# Altium PCB PCB1.PcbDoc (part 1 of 2)
Units mm, origin at the board's own origin, x right, y up, seen from the top; angles counter-clockwise.
Board outline 70 x 15 mm, 4 copper layers (Top Layer, GND, VCC, Bottom Layer), stack 0.694 mm thick; 63 components, 43 nets, 212 pads, 80 vias.
Unrouted connection lines stored in the file: 38.
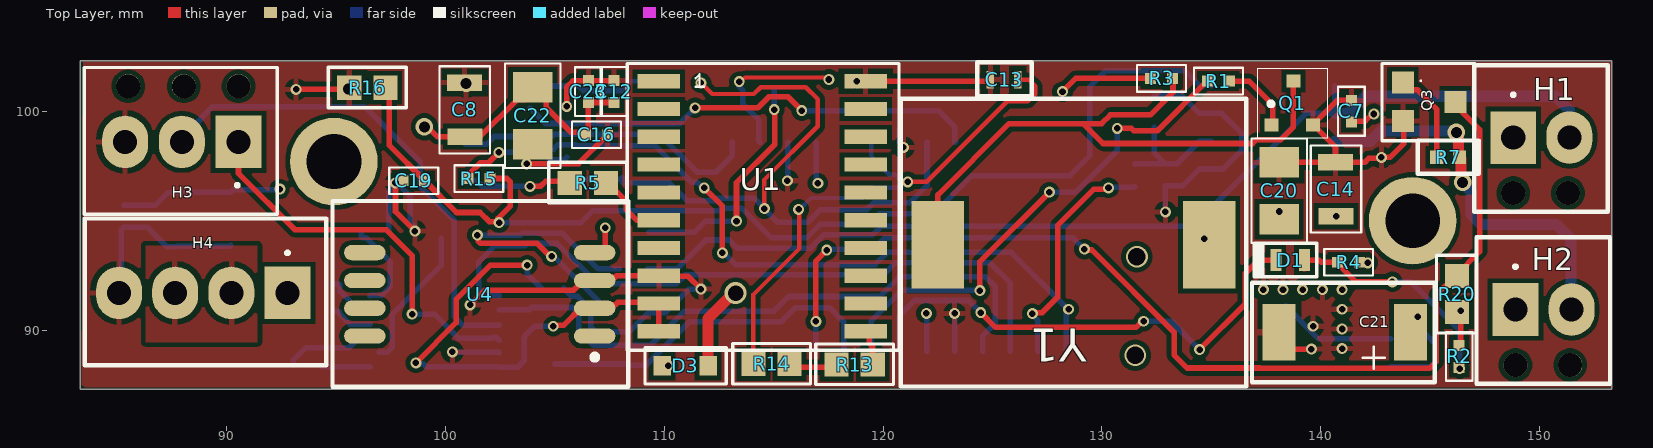
[diagram p0: Top Layer view]
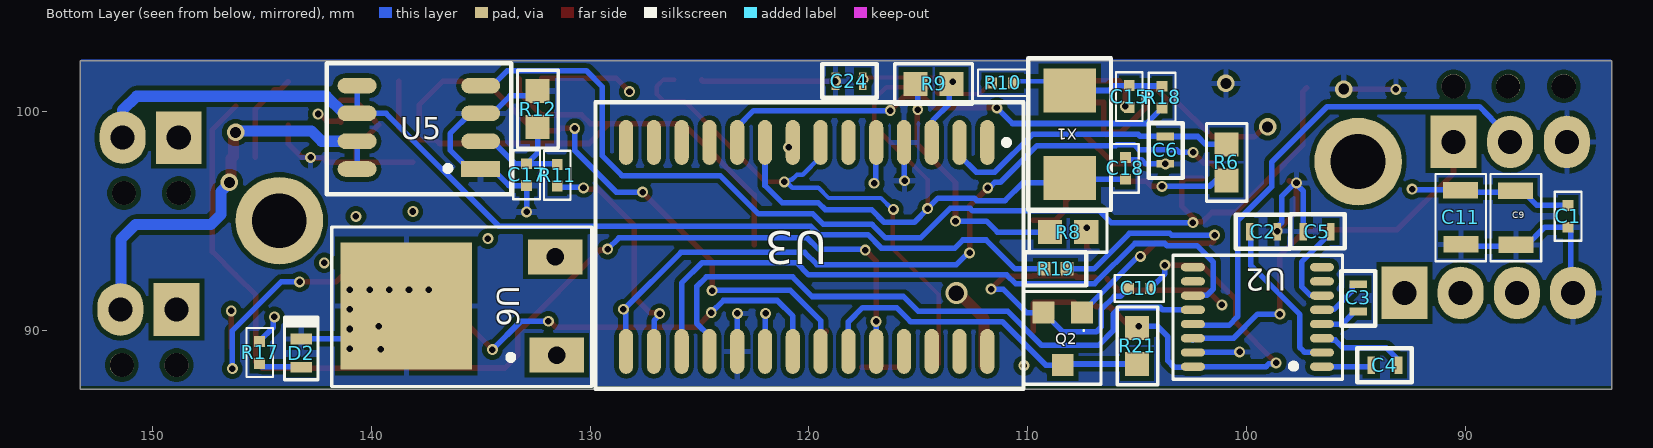
[diagram p1: Bottom Layer view, seen from below]
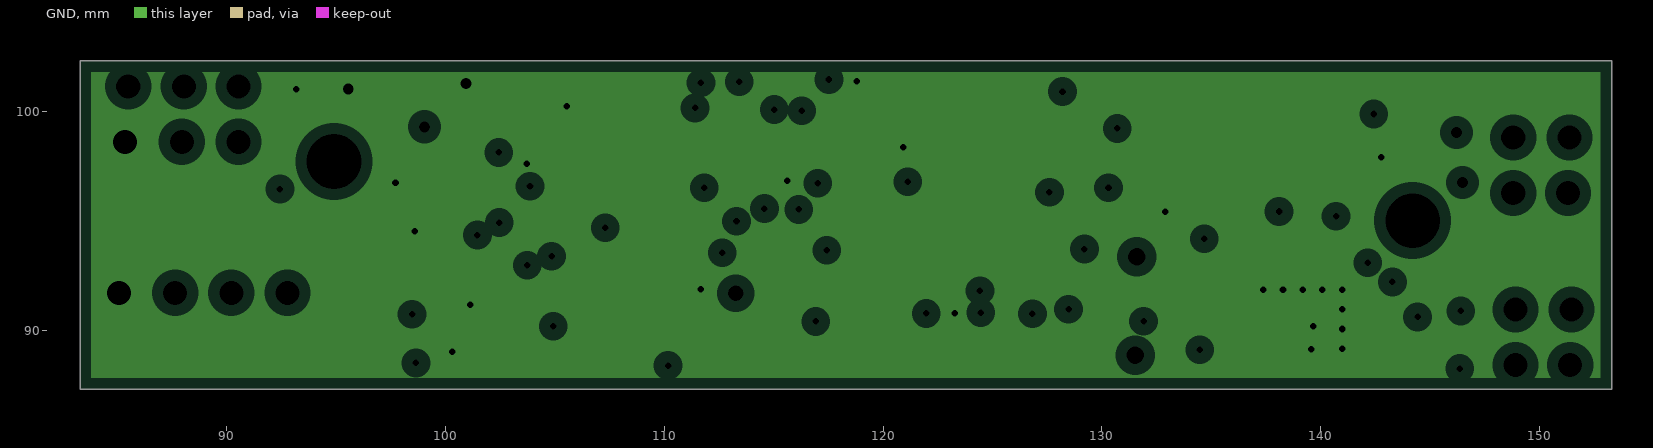
[diagram p2: GND, clearances drawn from the general rule]
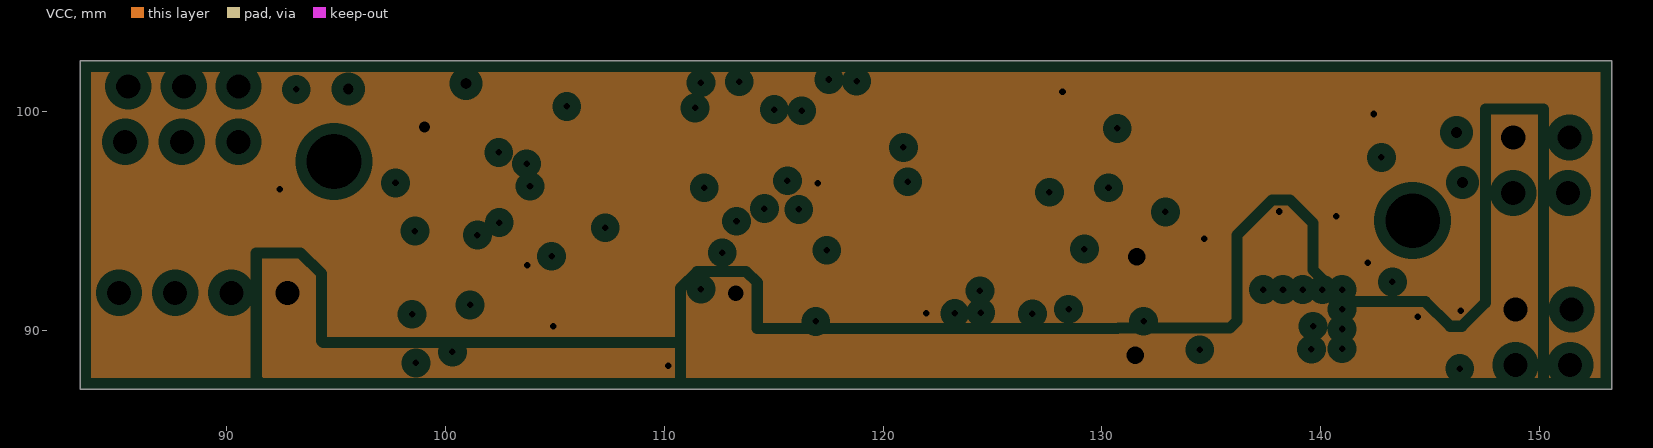
[diagram p3: VCC, clearances drawn from the general rule]
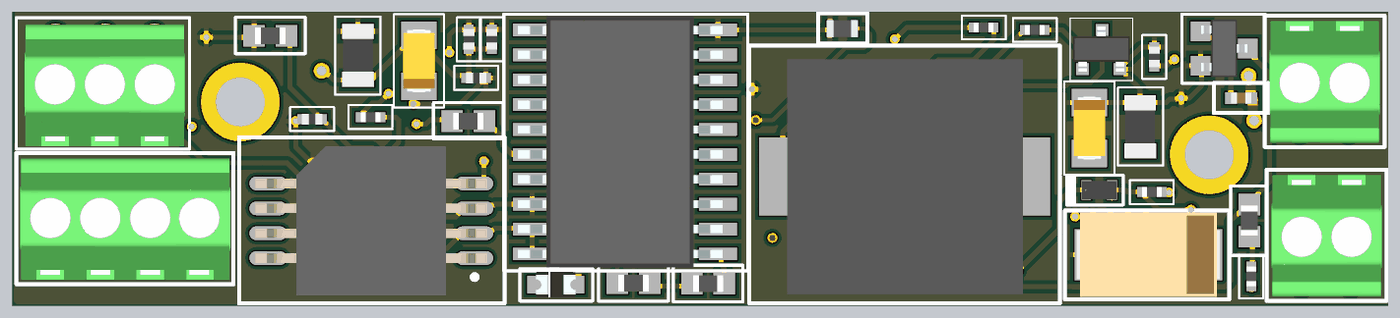
[diagram p4: 3D render of the assembled board from above, using the file's embedded part models]
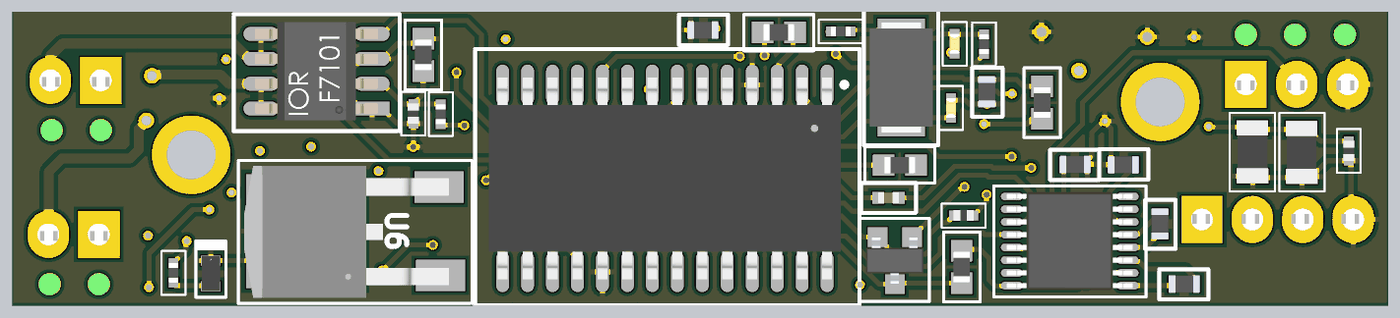
[diagram p5: 3D render of the assembled board from below, using the file's embedded part models]

## Layer stack, top to bottom
Top Solder: solder mask 0.0102, Solder Resist, Dk 3.5
Top Layer: signal copper 0.035
Dielectric 2: prepreg 0.1168, PP-016, Dk 4.4
GND: plane copper 0.035, net GND
Dielectric 1: dielectric 0.32, FR-4, Dk 4.8
VCC: plane copper 0.035, net (Multiple Nets)
Dielectric 3: prepreg 0.1168, PP-016, Dk 4.4
Bottom Layer: signal copper 0.035
Bottom Solder: solder mask 0.0102, Solder Resist, Dk 3.5

## Board outline
83.3,102.3 153.3,102.3 153.3,87.3 83.3,87.3

## Design rules (kind name [scope] priority, off if disabled: settings)
Clearance [All] p1: gap=0.21 ignorepadtopadclearanceinfootprint=TRUE
MinimumSolderMaskSliver MinimumSolderMaskSliver_U2 [Component = 'U2' vs InPadClass('All Pads')] p1: minsoldermaskwidth=0.01
MinimumSolderMaskSliver [All;] p2: minsoldermaskwidth=0.2
PlaneClearance [All] p1: clearance=0.508
PlaneConnect [All] p1: planeconnectstyle=Relief reliefexpansion=0.508 reliefentries=4 reliefconductorwidth=0.254 reliefairgap=0.254
PolygonConnect [All] p1: connectstyle=Relief reliefconductorwidth=0.254 reliefentries=4 polygonreliefangle="90 Angle" airgapwidth=0.254
RoutingVias [All] p1: holewidth=0.3 width=0.5 viastyle="Through Hole" minholewidth=0.3 minwidth=0.4 maxholewidth=1 maxwidth=1.2
SilkToSilkClearance [All] p1: silktosilkclearance=0.203
SilkToSolderMaskClearance [IsPad] p1: minsilkscreentomaskgap=0.16 clearancetoexposedcopper=TRUE
SolderMaskExpansion [All] p1: expansion=0.082 istentingtop=FALSE
Width [All] p1: maxlimit=0.508 minlimit=0.127 preferedwidth=0.254
25 further rules are at their usual default settings.

## Components (designator, comment, footprint, x,y, rotation, side; value= is the part's Value field where it differs from the comment)
C1 "100n" GRM155R71C104KA88D 85.3,95.2 r90 bottom
C2 "0.47 uF" TMK107F474ZA-T 99.225,94.5 r0 bottom value=470nF
C3 "0.47 uF" TMK107F474ZA-T 94.9,91.475 r270 bottom value=470nF
C4 "0.47 uF" TMK107F474ZA-T 93.675,88.4 r0 bottom value=470nF
C5 "0.47 uF" TMK107F474ZA-T 96.775,94.5 r180 bottom value=470nF
C6 "0.47 uF" TMK107F474ZA-T 103.708,98.222 r270 bottom value=470nF
C7 "100n" GRM155R71C104KA88D 141.4,100 r270 top
C8 "1u" CC1206KKX7R7BB105 100.889,100.076 r90 top
C9 "1u" CC1206KKX7R7BB105 87.7,95.125 r270 bottom
C10 "100n" GRM155R71C104KA88D 104.9,91.9 r0 bottom
C11 "1u" CC1206KKX7R7BB105 90.2,95.15 r90 bottom
C12 "100n" GRM155R71C104KA88D 107.7,100.9 r270 top
C13 "0.47 uF" TMK107F474ZA-T 125.527,101.448 r0 top value=470nF
C14 "1u" CC1206KKX7R7BB105 140.687,96.435 r270 top
C15 "8pF" GRM1555C1H8R0DZ01D 105.359,100.668 r90 bottom
C16 "100n" GRM155R71C104KA88D 106.9,98.925 r180 top
C17 "100n" GRM155R71C104KA88D 132.9,97.1 r90 bottom
C18 "8pF" GRM1555C1H8R0DZ01D 105.537,97.392 r90 bottom
C19 "100n" GRM155R71C104KA88D 98.55,96.825 r0 top
C20 "1uF" TPSA105K020R3000 138.1,96.368 r270 top
C21 "100uF" B45197A3107K509 141.1,89.9 r180 top
C22 "1uF" TPSA105K020R3000 103.988,99.797 r90 top
C23 "100n" GRM155R71C104KA88D 106.528,100.897 r270 top
C24 "0.47 uF" TMK107F474ZA-T 118.161,101.371 r180 bottom value=470nF
D1 "LED_ON" LNJ314G8TRA 138.6,93.2 r180 top
D2 "LED_ON" LNJ314G8TRA 143.2,88.95 r90 bottom
D3 "SD0805S020S1R0" SD0805S020S1R0 110.95,88.375 r0 top
H1 "1725656" "MPT 0,5/ 2-2,54" 150.07,98.8 r0 top
H2 "1725656" "MPT 0,5/ 2-2,54" 150.17,90.94 r0 top
H3 "1725669" "MPT 0,5/ 3-2,54" 89.27,98.6 r180 top
H4 "MPT0,5/4-2,54" "MPT 0,5/ 4-2,54" 88.966,91.7 r180 top
Q1 "BC817-25,235" BC817-25,235 137.75,99.375 r90 top
Q2 "MMBT6427" MMBT6427-7-F 108.4,89.6 r270 bottom
Q3 "MMBT6427" MMBT6427-7-F 144.958,100.432 r0 top
R1 "1k" CRCW04021K00JNED 135.325,101.375 r0 top
R2 "560R" CRCW0402560RJNED 146.329,88.798 r270 top
R3 "1k" CRCW04021K00JNED 132.725,101.5 r0 top
R4 "560R" CRCW0402560RJNED 141.275,93.1 r180 top
R5 "100k" MCT0603PD1003DP500 106.502,96.723 r180 top
R6 "100k" MCT0603PD1003DP500 100.914,97.663 r90 bottom
R7 "100k" RCA0402100KFKED 145.825,97.9 r0 top
R8 "100k" MCT0603PD1003DP500 108.15,94.475 r0 bottom
R9 "100k" MCT0603PD1003DP500 114.3,101.25 r180 bottom
R10 "1M" CRCW04021M00FKED 111.15,101.3 r0 bottom
R11 "1k" CRCW04021K00JNED 131.5,97.075 r270 bottom
R12 "100k" MCT0603PD1003DP500 132.4,100.1 r90 bottom
R13 "100k" MCT0603PD1003DP500 118.7,88.425 r180 top
R14 "100k" MCT0603PD1003DP500 114.9,88.45 r180 top
R15 "1k" CRCW04021K00JNED 101.524,96.926 r180 top
R16 "100k" MCT0603PD1003DP500 96.425,101.075 r180 top
R17 "560R" CRCW0402560RJNED 145.1,88.975 r270 bottom
R18 "1k" CRCW04021K00JNED 103.861,100.643 r90 bottom
R19 "100k" RCA0402100KFKED 108.725,92.8 r0 bottom
R20 "100k" MCT0603PD1003DP500 146.228,91.643 r270 top
R21 "100k" MCT0603PD1003DP500 105,89.275 r90 bottom
U1 "MMA3201KEGR2" MMA3201KEG 114.224,95.783 r0 top
U2 "MAX3232IPWR" MAX3232IPWR 99.5,90.6 r0 bottom
U3 "PIC18F2523-I/SO" PIC18F2523-I/SO 120.1,93.8 r270 bottom
U4 "MPXH6115A6U" MPXH6115A6U 101.564,91.633 r180 top
U5 "IRF7101TRPBF" IRF7101TRPBF 135,97.36 r0 bottom
U6 "MC78M05BDTG" MC78M05BDTG 135.149,91.1 r0 bottom
X1 "QZP10MEG" NX5032GA-10.000000MHZ 108.075,98.95 r90 bottom
Y1 "BUZZER" PKLCS1212E4001-R1 128.7,93.9 r180 top

## Footprints (in the part's own frame and the unit in brackets; to place one, negate y for a bottom-side part, rotate by r counter-clockwise, add the part's x,y. Pads: shape width x height; smd on the part's side, far side on the other; paste and mask are expansions set on the pad)
B45197A3107K509 [mm]
  rect 1.5x2.6 smd: 1(-3,0) 2(3,0)
  silkscreen extent -4.11,-2.26 4.24,2.29, body extent -3.64,-2.15 3.64,2.15, height 4.44
BC817-25,235 [mm] "SOT23, 3-Leads, Body 2,90x2,30mm, Pitch 0,95mm, IPC Low Density"
  rect 0.6x0.65 smd: 1(0,0) 2(0,-1.9) 3(2,-1)
  silkscreen extent -0.58,-2.57 2.59,0.64, body extent -0.13,-2.41 2.17,0.49, height 1.1
CC1206KKX7R7BB105 [mm]
  rect 0.75x1.6 smd: 1(-1.235,-0.013) 2(1.235,0.013)
  silkscreen extent -2.01,-1.14 1.98,1.17, body extent -1.6,-0.8 1.6,0.8, height 0.71
CRCW04021K00JNED [mm]
  rect 0.5x0.5 smd: 1(-0.5,0) 2(0.5,0)
  silkscreen extent -1.12,-0.61 1.12,0.61, body extent -0.5,-0.25 0.5,0.25, height 0.4
CRCW04021M00FKED [mm]
  rect 0.5x0.5 smd: 1(-0.5,0) 2(0.5,0)
  silkscreen extent -1.12,-0.61 1.12,0.61, body extent -0.5,-0.25 0.5,0.25, height 0.4
CRCW0402560RJNED [mm]
  rect 0.5x0.5 smd: 1(-0.5,0) 2(0.5,0)
  silkscreen extent -1.12,-0.61 1.12,0.61, body extent -0.5,-0.25 0.5,0.25, height 0.4
GRM155R71C104KA88D [mm]
  rect 0.5x0.5 smd: 1(-0.5,0) 2(0.5,0)
  silkscreen extent -1.12,-0.61 1.12,0.61, body extent -0.52,-0.28 0.52,0.28, height 0.56
GRM1555C1H8R0DZ01D [mm]
  rect 0.5x0.5 smd: 1(-0.5,0) 2(0.5,0)
  silkscreen extent -1.12,-0.61 1.12,0.61, body extent -0.5,-0.25 0.5,0.25, height 0.56
IRF7101TRPBF [mil] "SOIC, 8-Leads, Body 4,90x3,90mm, Pitch 1,27mm, IPC Low Density"
  rect 70x28 smd: 1(0,0)
  oval 70x28 smd: 2(0,-50) 3(0,-100) 4(0,-150) 5(222.44,-150) 6(222.44,-100) 7(222.44,-50) 8(222.44,0)
  silkscreen extent -55,-190 277,45, body extent -11,-173 234,23, height 69
LNJ314G8TRA [mm]
  rect 0.5x1 smd: 1(-0.65,0) 2(0.65,0)
  silkscreen extent -1.22,-0.76 1.65,0.79, body extent -0.88,-0.47 0.88,0.47, height 0.51
MAX3232IPWR [mm] "TSOP, 16-Leads, Body 5,00x4,40mm, Pitch 0,65mm, IPC Medium Density"
  oval 1.1x0.38 smd: 1(-2.95,2.275) 2(-2.95,1.625) 3(-2.95,0.975) 4(-2.95,0.325) 5(-2.95,-0.325) 6(-2.95,-0.975) 7(-2.95,-1.625) 8(-2.95,-2.275) 9(2.95,-2.275) 10(2.95,-1.625) 11(2.95,-0.975) 12(2.95,-0.325) 13(2.95,0.325) 14(2.95,0.975) 15(2.95,1.625) 16(2.95,2.275)
  silkscreen extent -3.89,-2.82 3.86,2.84, body extent -3.2,-2.5 3.2,2.5, height 1.13
MC78M05BDTG [mm] "D-PAK, 3-Pads, Body 6,21x6,73mm (max), IPC Low Density"
  rect 2.5x1.6 smd: 1(-3.627,2.25) 3(-3.552,-2.25)
  rect 6x5.8 smd: 4(3.251,0)
  silkscreen extent -5.23,-3.61 6.65,3.68, body extent -4.05,-3.34 6.37,3.39, height 1.7
MCT0603PD1003DP500 [mm]
  rect 1.1x1.1 smd: 1(-0.825,0) 2(0.825,0)
  silkscreen extent -1.78,-0.94 1.78,0.91, body extent -0.77,-0.43 0.77,0.43, height 0.55
MMA3201KEG [mm]
  rect 1.95x0.65 smd: 1(-4.471,5.588) 2(-4.471,4.318) 3(-4.471,3.048) 4(-4.471,1.778) 5(-4.471,0.508) 6(-4.471,-0.762) 7(-4.471,-2.032) 8(-4.471,-3.302) 9(-4.471,-4.572) 10(-4.471,-5.842) 11(4.979,-5.842) 12(4.979,-4.572) 13(4.979,-3.302) 14(4.979,-2.032) 15(4.979,-0.762) 16(4.979,0.508) 17(4.979,1.778) 18(4.979,3.048) 19(4.979,4.318) 20(4.979,5.588)
  silkscreen extent -5.92,-6.71 6.5,6.4, body extent -5.21,-6.53 5.21,6.28, height 3.55
MMBT6427-7-F [mm] "SOT223, 3-Leads, Body 2,90x2,36mm (avg), Pitch 1,75mm, IPC Medium Density"
  rect 1x1 smd: 1(-1.2,0.875) 2(-1.2,-0.875) 3(1.2,0)
  silkscreen extent -2.16,-1.78 2.08,1.75, body extent -1.18,-1.46 1.18,1.46, height 1.11
"MPT 0,5/ 2-2,54" [mm]
  rect 2.1x2.4 hole 1.1: 1(-1.27,0)
  oval 2.1x2.4 hole 1.1: 2(1.295,0)
  round 1.1 hole 1.1: ""(-1.27,-2.54) ""(1.23,-2.54)
  silkscreen extent -3.05,-3.4 3.05,3.3, body extent -2.8,-3.17 2.8,3.03, height 8.5
"MPT 0,5/ 3-2,54" [mm]
  rect 2.1x2.4 hole 1.1: 1(-1.27,0)
  oval 2.1x2.4 hole 1.1: 2(1.321,0) 3(3.912,0)
  round 1.1 hole 1.1: ""(-1.27,-2.54) ""(1.23,-2.54) ""(3.77,-2.54)
  silkscreen extent -3.05,-3.4 5.77,3.3, body extent -2.81,-3.05 5.33,3.15, height 8.5
"MPT 0,5/ 4-2,54" [mm]
  rect 2.1x2.4 hole 1.1: 1(-3.81,0)
  oval 2.1x2.4 hole 1.1: 2(-1.245,0) 3(1.321,0) 4(3.886,0)
  silkscreen extent -5.59,-3.4 5.46,3.3, body extent -5.42,-3.12 5.26,3.08, height 8.51
MPXH6115A6U [mm] "SOP, 8-Leads, Body 7,37x7,37mm, Pitch 1,27mm, IPC Medium Density"
  oval 1.9x0.7 smd: 1(-5.25,1.905) 2(-5.25,0.635) 3(-5.25,-0.635) 4(-5.25,-1.905) 5(5.25,-1.905) 6(5.25,-0.635) 7(5.25,0.635) 8(5.25,1.905)
  silkscreen extent -6.78,-4.27 6.73,4.22, body extent -5.9,-3.81 5.9,3.81, height 4.8
NX5032GA-10.000000MHZ [mm]
  rect 2x2.4 smd: 1(-2,0) 2(2,0)
  silkscreen extent -3.45,-1.88 3.48,1.91, body extent -2.8,-1.6 2.8,1.6, height 1.6
PIC18F2523-I/SO [mm] "SOIC, 28-Leads, Body 17,90x7,50mm, Pitch 1,27mm, IPC Low Density"
  oval 2.05x0.65 smd: 1(-4.775,8.255) 2(-4.775,6.985) 3(-4.775,5.715) 4(-4.775,4.445) 5(-4.775,3.175) 6(-4.775,1.905) 7(-4.775,0.635) 8(-4.775,-0.635) 9(-4.775,-1.905) 10(-4.775,-3.175) 11(-4.775,-4.445) 12(-4.775,-5.715) 13(-4.775,-6.985) 14(-4.775,-8.255) 15(4.775,-8.255) 16(4.775,-6.985) 17(4.775,-5.715) 18(4.775,-4.445) 19(4.775,-3.175) 20(4.775,-1.905) 21(4.775,-0.635) 22(4.775,0.635) 23(4.775,1.905) 24(4.775,3.175) 25(4.775,4.445) 26(4.775,5.715) 27(4.775,6.985) 28(4.775,8.255)
  silkscreen extent -6.6,-9.65 6.48,9.91, body extent -5.16,-8.95 5.16,8.95, height 2.64
PKLCS1212E4001-R1 [mm]
  rect 2.4x4 smd: 1(-6.2,0) 2(6.2,0)
  silkscreen extent -7.9,-6.68 7.9,6.48, body extent -6.03,-5.97 5.97,6.03, height 3.01
RCA0402100KFKED [mm]
  rect 0.6x0.6 smd: 1(-0.525,0) 2(0.525,0)
  silkscreen extent -1.4,-0.76 1.4,0.76, body extent -0.52,-0.28 0.52,0.28, height 0.41
SD0805S020S1R0 [mm]
  rect 0.8x0.9 smd: 1(-1.05,0) 2(1.05,0)
  silkscreen extent -1.83,-0.84 1.88,0.81, body extent -1.01,-0.65 1.01,0.65, height 0.8
TMK107F474ZA-T [mm]
  rect 0.35x0.8 smd: 1(-0.625,0) 2(0.625,0)
  silkscreen extent -1.22,-0.76 1.27,0.79, body extent -0.8,-0.46 0.8,0.44, height 0.81
TPSA105K020R3000 [mm]
  rect 1.4x1.8 smd: 1(-1.3,0) 2(1.3,0)
  silkscreen extent -2.39,-1.27 2.39,1.27, body extent -1.6,-0.8 1.6,0.8, height 1.81

## Part data
C1 C7 C10 C12 C16 C17 C19 C23: library part GRM155R71C104KA88D, "Multilayer Ceramic Capacitor, 0.1 uF, 16 V, ï¿½ 10%, X7R, 0402 [1005 Metric]", Capacitance=100nF, Case Code (Imperial)=0402, Case Code (Metric)=1005, Dielectric=X7R, Dielectric Material=4241ConductorMaterial, Manufacturer=Murata, Max Operating Temperature=125°C, Min Operating Temperature=-55°C, Package Quantity=1, Supplier Part Number 1=5964861, Tolerance=10%, Voltage=16V, Case/Package=0402, Category="Ceramic Capacitors", ComponentLink1Description=https://datasheet.ciiva.com/129/grm155r71c104ka88-01-129739.pdf?src-supplier=Digikey, ComponentLink1URL=https://datasheet.ciiva.com/129/grm155r71c104ka88-01-129739.pdf?src-supplier=Digikey, ComponentLink2Description=https://datasheet.ciiva.com/129/grm155r71c104ka88-01-129740.pdf?src-supplier=Digikey, ComponentLink2URL=https://datasheet.ciiva.com/129/grm155r71c104ka88-01-129740.pdf?src-supplier=Digikey, ComponentLink3Description=https://datasheet.ciiva.com/18102/getdatasheetpartid-85307-18102905.pdf?src-supplier=Verical, ComponentLink3URL=https://datasheet.ciiva.com/18102/getdatasheetpartid-85307-18102905.pdf?src-supplier=Verical, ComponentLink4Description=https://datasheet.ciiva.com/29199/454098-da-01-en-vs-kondensator-0402-29199799.pdf?src-supplier=Conrad, ComponentLink4URL=https://datasheet.ciiva.com/29199/454098-da-01-en-vs-kondensator-0402-29199799.pdf?src-supplier=Conrad, ComponentLink5Description=https://datasheet.ciiva.com/7937/4360-7937615.pdf?src-supplier=Element14, ComponentLink5URL=https://datasheet.ciiva.com/7937/4360-7937615.pdf?src-supplier=Element14, ComponentLink6Description=https://datasheet.ciiva.com/28534/4360-28534127.pdf?src-supplier=Element14, ComponentLink6URL=https://datasheet.ciiva.com/28534/4360-28534127.pdf?src-supplier=Element14, ComponentLink7Description=https://datasheet.ciiva.com/28534/4360-28534133.pdf?src-supplier=Element14, ComponentLink7URL=https://datasheet.ciiva.com/28534/4360-28534133.pdf?src-supplier=Element14, ComponentLink8Description=https://datasheet.ciiva.com/16199/product-16199000.pdf?src-supplier=Future+Electronics, ComponentLink8URL=https://datasheet.ciiva.com/16199/product-16199000.pdf?src-supplier=Future+Electronics, ComponentLink9Description=https://datasheet.ciiva.com/14103/grmseries-highdielectrictype-eng-14103750.pdf?src-supplier=Distrelec, ComponentLink9URL=https://datasheet.ciiva.com/14103/grmseries-highdielectrictype-eng-14103750.pdf?src-supplier=Distrelec, ComponentLink10Description=https://datasheet.ciiva.com/14116/grmseries-highdielectrictype-eng-14116878.pdf?src-supplier=Distrelec, ComponentLink10URL=https://datasheet.ciiva.com/14116/grmseries-highdielectrictype-eng-14116878.pdf?src-supplier=Distrelec, Depth=0.5mm, Height=0.5mm, Lead Free="Lead Free", Length=1mm, Manufacturer Part Number=GRM155R71C104KA88D, Material=Ceramic, Mount="Surface Mount", Number of Pins=2, Packaging="Tape and Reel", Pricing 1="10000=0,0044, 40000=0,0043, 100000=0,0042, 250000=0,004, 400000=0,0039 (USD)", Radiation Hardening=No, Reach SVHC Compliant=Unknown, RoHS=Yes, RoHS Compliant=Yes, Series=GRM, Stock 1=33520000, Supplier 1="Future Electronics", Termination=SMD/SMT, Thickness=0.022inch, Voltage Rating=16V, Voltage Rating (DC)=16V, Width=0.02inch
C2 C3 C4 C5 C6 C13 C24: library part TMK107F474ZA-T, "Multilayer Ceramic Capacitors (High dielectric type), 25V, 0.47 uF, +80%, 0603, Y5V/F, RoHS", Case/Package=0603, Dielectric=Y5V, Manufacturer=Taiyo, Supplier Part Number=08P5185, Voltage Rating (DC)=25V, Halogen Free="Halogen Free", Height=800um, Lead Free="Lead Free", Length=1.6mm, Manufacturer Part Number=TMK107F474ZA-T, Packaging="Cut Tape", Pins=2, RoHS=No, Supplier=Newark, Width=800um
C8 C9 C11 C14: library part CC1206KKX7R7BB105, "Multilayer Ceramic Capacitor, 1 uF, 16 V, ï¿½ 10%, X7R, 1206 [3216 Metric]", Capacitance=1uF, Case Code (Imperial)=1206, Case Code (Metric)=3216, Dielectric=X7R, Dielectric Material=Ceramic, Insulation Resistance=100GR, Manufacturer=Yageo, Max Operating Temperature=125°C, Min Operating Temperature=-55°C, Package Quantity=1, Supplier Part Number 1=9057753, Tolerance=10%, Voltage Rating=16V, Case/Package=1206, Category="Ceramic Capacitors", ComponentLink1Description=https://datasheet.ciiva.com/178/mlccorderingcode-178166.pdf?src-supplier=Digikey, ComponentLink1URL=https://datasheet.ciiva.com/178/mlccorderingcode-178166.pdf?src-supplier=Digikey, ComponentLink2Description=https://datasheet.ciiva.com/178/mlccorderingcode-178167.pdf?src-supplier=Digikey, ComponentLink2URL=https://datasheet.ciiva.com/178/mlccorderingcode-178167.pdf?src-supplier=Digikey, ComponentLink3Description=https://datasheet.ciiva.com/178/mlccorderingcode-178168.pdf?src-supplier=Digikey, ComponentLink3URL=https://datasheet.ciiva.com/178/mlccorderingcode-178168.pdf?src-supplier=Digikey, ComponentLink4Description=https://datasheet.ciiva.com/7978/1489800-7978229.pdf?src-supplier=Element14, ComponentLink4URL=https://datasheet.ciiva.com/7978/1489800-7978229.pdf?src-supplier=Element14, ComponentLink5Description=https://datasheet.ciiva.com/11464/upy-gphc-x7r-6-3v-to-50v-8-11464763.pdf?src-supplier=Avnet, ComponentLink5URL=https://datasheet.ciiva.com/11464/upy-gphc-x7r-6-3v-to-50v-8-11464763.pdf?src-supplier=Avnet, Depth=1.6mm, Halogen Free="Halogen Free", Height=1.15mm, Lead Free="Lead Free", Length=3.2mm, Manufacturer Part Number=CC1206KKX7R7BB105, Material=4241ConductorMaterial, Mount="Surface Mount", Number of Pins=2, Packaging="Tape and Reel", Pricing 1="3000=0,0252 (USD)", Radiation Hardening=No, Reach SVHC Compliant=No, RoHS=Yes, RoHS Compliant=Yes, Series=CC, Stock 1=174000, Supplier 1="Future Electronics", Termination=SMD/SMT, Thickness=0.045inch, Voltage Rating (AC)=16V, Voltage Rating (DC)=16V, Width=0.063inch
C15 C18: library part GRM1555C1H8R0DZ01D, "Cap Ceramic 8pF 50V C0G 0.5pF SMD 0402 125°C Paper T/R", Case Code (Imperial)=0402, Case Code (Metric)=1005, Dielectric=C0G, Manufacturer=Murata, Max Operating Temperature=125°C, Min Operating Temperature=-55°C, Package Quantity=10000, Voltage Rating=50V, Case/Package=0402, Category="Ceramic Capacitors", ComponentLink1Description=https://datasheet.ciiva.com/3778/8361grm1555c1h8r0dz0123-3778464.pdf?src-supplier=Arrow+Electronics, ComponentLink1URL=https://datasheet.ciiva.com/3778/8361grm1555c1h8r0dz0123-3778464.pdf?src-supplier=Arrow+Electronics, ComponentLink2Description=https://datasheet.ciiva.com/5413/product-5413574.pdf?src-supplier=Mouser, ComponentLink2URL=https://datasheet.ciiva.com/5413/product-5413574.pdf?src-supplier=Mouser, ComponentLink3Description=https://datasheet.ciiva.com/11610/product-11610154.pdf?src-supplier=Avnet, ComponentLink3URL=https://datasheet.ciiva.com/11610/product-11610154.pdf?src-supplier=Avnet, Construction=Flat, Depth=0.5mm, Height=0.5mm, Lead Free="Lead Free", Length=1mm, Manufacturer Part Number=GRM1555C1H8R0DZ01D, Mounting Technology="Surface Mount", Packaging="Tape and Reel", Pricing="10=0,05, 100=0,04, 1000=0,04, 10000=0,04 (USD)", Radiation Hardening=No, RoHS=Yes, RoHS Compliant=Yes, Series=GRM, Stock=59869, Supplier="CXDA Electronics", Supplier Part Number=GRM1555C1H8R0DZ01D, Termination=SMD/SMT, Thickness=0.022inch, Voltage Rating (DC)=50V, Width=0.02inch
C20 C22: library part TPSA105K020R3000, "Cap Tant Solid 1uF 20V A CASE 10%( 3.2 X 1.6 X 1.6mm) Inward L SMD 3216-18 3 Ohm 125C T/R", Case Code (Imperial)=1206, Case Code (Metric)=3216, Dielectric Material=Tantalum, ESR (Equivalent Series Resistance)=3R, Leakage Current=500nA, Manufacturer="Kyocera AVX", Max Operating Temperature=125°C, Min Operating Temperature=-55°C, Package Quantity=1, Supplier Part Number=478-2399-1-ND, Tolerance=10%, Voltage=20V, Case/Package=1206, Category="Tantalum Capacitors", ComponentLink1Description=https://datasheet.ciiva.com/26341/806571-da-01-en-smd-tantal1uf-20v-10-3-000r-2000st-26341825.pdf?src-supplier=Conrad, ComponentLink1URL=https://datasheet.ciiva.com/26341/806571-da-01-en-smd-tantal1uf-20v-10-3-000r-2000st-26341825.pdf?src-supplier=Conrad, ComponentLink2Description=https://datasheet.ciiva.com/263/tps-263911.pdf?src-supplier=Digikey, ComponentLink2URL=https://datasheet.ciiva.com/263/tps-263911.pdf?src-supplier=Digikey, ComponentLink3Description=https://datasheet.ciiva.com/263/tps-263912.pdf?src-supplier=Digikey, ComponentLink3URL=https://datasheet.ciiva.com/263/tps-263912.pdf?src-supplier=Digikey, ComponentLink4Description=https://datasheet.ciiva.com/263/tps-263913.pdf?src-supplier=Digikey, ComponentLink4URL=https://datasheet.ciiva.com/263/tps-263913.pdf?src-supplier=Digikey, ComponentLink5Description=https://datasheet.ciiva.com/7832/1441576-7832617.pdf?src-supplier=Element14, ComponentLink5URL=https://datasheet.ciiva.com/7832/1441576-7832617.pdf?src-supplier=Element14, ComponentLink6Description=https://datasheet.ciiva.com/7832/1441576-7832845.pdf?src-supplier=Element14, ComponentLink6URL=https://datasheet.ciiva.com/7832/1441576-7832845.pdf?src-supplier=Element14, ComponentLink7Description=https://datasheet.ciiva.com/7832/1441576-7832846.pdf?src-supplier=Element14, ComponentLink7URL=https://datasheet.ciiva.com/7832/1441576-7832846.pdf?src-supplier=Element14, ComponentLink8Description=https://datasheet.ciiva.com/7832/tps-7832847.pdf?src-supplier=Element14, ComponentLink8URL=https://datasheet.ciiva.com/7832/tps-7832847.pdf?src-supplier=Element14, ComponentLink9Description=https://datasheet.ciiva.com/28555/1932865-28555241.pdf?src-supplier=Element14, ComponentLink9URL=https://datasheet.ciiva.com/28555/1932865-28555241.pdf?src-supplier=Element14, ComponentLink10Description=https://datasheet.ciiva.com/12910/tps-23028-12910247.pdf?src-supplier=Mouser, ComponentLink10URL=https://datasheet.ciiva.com/12910/tps-23028-12910247.pdf?src-supplier=Mouser, ComponentLink11Description=https://datasheet.ciiva.com/16224/tps-16224686.pdf?src-supplier=Future+Electronics, ComponentLink11URL=https://datasheet.ciiva.com/16224/tps-16224686.pdf?src-supplier=Future+Electronics, ComponentLink12Description=https://datasheet.ciiva.com/14590/70001047-14590583.pdf?src-supplier=Allied+Electronics, ComponentLink12URL=https://datasheet.ciiva.com/14590/70001047-14590583.pdf?src-supplier=Allied+Electronics, ComponentLink13Description=https://datasheet.ciiva.com/14590/70001047-14590587.pdf?src-supplier=Allied+Electronics, ComponentLink13URL=https://datasheet.ciiva.com/14590/70001047-14590587.pdf?src-supplier=Allied+Electronics, ComponentLink14Description=https://datasheet.ciiva.com/3004/tps-3004579.pdf?src-supplier=Avnet, ComponentLink14URL=https://datasheet.ciiva.com/3004/tps-3004579.pdf?src-supplier=Avnet, Construction=Flat, Depth=1.6mm, Dissipation Factor=4%, Features="General Purpose", Height=1.6mm, Height - Seated (Max)=0.071inch, Lead Free="Lead Free", Lead Pitch=1.1mm, Length=3.2mm, Manufacturer Part Number=TPSA105K020R3000, Mounting Technology="Surface Mount,PCB", Packaging="Tape and Reel", Pins=2, Polarity=Polar, Pricing="1=0,76, 10=0,459, 50=0,3398, 100=0,3028, 500=0,2398, 1000=0,22014, 2000=0,20387, 4000=0,19039, 6000=0,18361, 10000=0,17607, 14000=0,17164, 20000=0,16737, 50000=0,15812 (USD)", Radiation Hardening=No, Reach SVHC Compliant=No, RoHS=Yes, RoHS Compliant=Yes, Series=TPS, Stock=46298, Supplier=Digikey, Termination=SMD/SMT, Voltage Rating=20V, Voltage Rating (DC)=20V, Weight=0.000571oz, Width=1.6mm
C21: library part B45197A3107K509, "Cap 100UF 16VDC 10% 7.3 X 4.3 X 4.1MM SMD 7343-43 T/r", Case Code (Imperial)=2917, Case Code (Metric)=7343, Dielectric Material=Tantalum, ESR (Equivalent Series Resistance)=100mR, Leakage Current=16uA, Manufacturer=KEMET, Max Operating Temperature=125°C, Min Operating Temperature=-55°C, Supplier Part Number 1=9751084, Tolerance=10%, Voltage=16V, Capacitance=100uF, Case/Package=2917, Category="Tantalum Capacitors", ComponentLink1Description=https://datasheet.ciiva.com/5934/58264-5934481.pdf?src-supplier=Farnell, ComponentLink1URL=https://datasheet.ciiva.com/5934/58264-5934481.pdf?src-supplier=Farnell, ComponentLink2Description=https://datasheet.ciiva.com/11793/0900766b809b4274-11793801.pdf?src-supplier=Rs, ComponentLink2URL=https://datasheet.ciiva.com/11793/0900766b809b4274-11793801.pdf?src-supplier=Rs, ComponentLink3Description=https://datasheet.ciiva.com/1464/1761160-1464734.pdf?src-supplier=Element14, ComponentLink3URL=https://datasheet.ciiva.com/1464/1761160-1464734.pdf?src-supplier=Element14, ComponentLink4Description=https://datasheet.ciiva.com/1464/1761160-1464735.pdf?src-supplier=Element14, ComponentLink4URL=https://datasheet.ciiva.com/1464/1761160-1464735.pdf?src-supplier=Element14, Depth=4.3mm, Dissipation Factor=8%, Height=4.4mm, Lead Free="Lead Free", Length=7.3mm, Manufacturer Part Number=B45197A3107K509, Mount="Surface Mount", Number of Pins=2, Packaging="Tape and Reel", Pricing 1="1=2,31, 10=1,54, 50=1,07, 100=0,889, 200=0,771, 400=0,66, 2000=0,578 (GBP)", Reach SVHC Compliant=No, RoHS=Yes, RoHS Compliant=Yes, Series=B45197A, Supplier 1=Farnell, Termination=SMD/SMT, Voltage Rating=16V, Voltage Rating (DC)=16V, Weight=0.023634oz, Width=4.3mm
D1 D2: library part LNJ314G8TRA, "Led SMT Grn Cut Tapes", Case Code (Imperial)=0603, Case Code (Metric)=1608, Color=Green, Forward Current=10mA, Forward Voltage=2.03V, Manufacturer="Panasonic SSG", Max Operating Temperature=85°C, Min Operating Temperature=-30°C, Power Rating=40mW, Case/Package=0603, Category=LEDs, ComponentLink1Description=https://datasheet.ciiva.com/9326/lnj314g8tra-bek-discon-9326750.pdf?src-supplier=Avnet, ComponentLink1URL=https://datasheet.ciiva.com/9326/lnj314g8tra-bek-discon-9326750.pdf?src-supplier=Avnet, Height=0.5mm, Illumination Color=Green, Lead Free="Lead Free", Length=1.6mm, Lens Size=0.8mm, Lens Style=Flat,Rectangular, Luminous Intensity=5mcd, Manufacturer Part Number=LNJ314G8TRA, Mount="Surface Mount", Number of LEDs=1, Number of Pins=2, Packaging="Tape and Reel", Pricing 1="1=1,03385 (USD)", Radiation Hardening=No, RoHS=Yes, RoHS Compliant=Yes, Series=-, Stock 1=450, Supplier 1="Ampacity Systems", Supplier Part Number 1=LNJ314G8TRA, Test Current=10mA, Wavelength=565nm, Width=0.8mm
D3: "Small Signal Schottky Diode, Single, 20 V, 1 A, 450 Mv, 10 A, 125 C Rohs Compliant: Yes", Average Rectified Current=1A, Case Code (Imperial)=0805, Case Code (Metric)=2012, Forward Voltage=450mV, Manufacturer="Kyocera AVX", Max Forward Surge Current (Ifsm)=10A, Max Operating Temperature=125°C, Max Repetitive Reverse Voltage (Vrrm)=20V, Max Reverse Current=200uA, Min Operating Temperature=-55°C, Supplier Part Number=478-7800-1-ND, Case/Package=0805, Category="Rectifier Diodes", ComponentLink1Description=https://datasheet.ciiva.com/29883/schottky-29883740.pdf?src-supplier=Avnet, ComponentLink1URL=https://datasheet.ciiva.com/29883/schottky-29883740.pdf?src-supplier=Avnet, ComponentLink2Description=https://datasheet.ciiva.com/29883/schottky-29883741.pdf?src-supplier=Avnet, ComponentLink2URL=https://datasheet.ciiva.com/29883/schottky-29883741.pdf?src-supplier=Avnet, ComponentLink3Description=https://datasheet.ciiva.com/13084/schottky-221155-13084174.pdf?src-supplier=Mouser, ComponentLink3URL=https://datasheet.ciiva.com/13084/schottky-221155-13084174.pdf?src-supplier=Mouser, Forward Current=1A, Manufacturer Part Number=SD0805S020S1R0, Max Reverse Leakage Current=200uA, Max Reverse Voltage (DC)=20V, Max Surge Current=10A, Mounting Technology="Surface Mount", Packaging="Cut Tape", Peak Non-Repetitive Surge Current=10A, Pins=2, Pricing="1=0,51, 10=0,311, 100=0,1972, 500=0,14792, 1000=0,132, 3000=0,11174, 6000=0,10152, 9000=0,09631, 15000=0,09046, 21000=0,08699, 30000=0,08362, 75000=0,07622 (USD)", Radiation Hardening=No, Reach SVHC Compliant=No, RoHS=Yes, RoHS Compliant=Yes, Series=-, Stock=72775, Supplier=Digikey
H1 H2: "Block, Terminal; 6 A; 63 V; 2.54 mm; 26 to 20 AWG; 2; Screw; Soldering; 1.5 kV", Color=Green, Current=6A, Flammability Rating="UL94 V-0", Housing Color=49Colour, Manufacturer="Phoenix Contact", Max Supply Voltage=63V, Package Quantity=50, Supplier Part Number 1=651-1725656, Voltage=125V, Approvals=UL,CSA,cULus,EAC, Category="Terminal Blocks", ComponentLink1Description=https://datasheet.ciiva.com/823/1725656-823793.pdf?src-supplier=Digikey, ComponentLink1URL=https://datasheet.ciiva.com/823/1725656-823793.pdf?src-supplier=Digikey, ComponentLink2Description=https://datasheet.ciiva.com/1120/319957-1120510.pdf?src-supplier=Farnell, ComponentLink2URL=https://datasheet.ciiva.com/1120/319957-1120510.pdf?src-supplier=Farnell, ComponentLink3Description=https://datasheet.ciiva.com/15169/getdatasheetpartid-199323-15169849.pdf?src-supplier=Verical, ComponentLink3URL=https://datasheet.ciiva.com/15169/getdatasheetpartid-199323-15169849.pdf?src-supplier=Verical, ComponentLink4Description=https://datasheet.ciiva.com/16071/1725656-16071846.pdf?src-supplier=Onlinecomponents.com, ComponentLink4URL=https://datasheet.ciiva.com/16071/1725656-16071846.pdf?src-supplier=Onlinecomponents.com, ComponentLink5Description=https://datasheet.ciiva.com/26340/788052-da-01-en-100ntklemme-1725656-250-st-26340907.pdf?src-supplier=Conrad, ComponentLink5URL=https://datasheet.ciiva.com/26340/788052-da-01-en-100ntklemme-1725656-250-st-26340907.pdf?src-supplier=Conrad, Connector Type="Screw,PCB,Terminal Block", Contact Material=Tin, Current Rating=6A, Depth=6.2mm, Height=6.2mm, Housing Material=Polyamide, Insulation Material=4261ConductorMaterial, Lead Free="Lead Free", Length=5.54mm, Manufacturer Part Number=1725656, Max Current Rating=6A, Mount="Through Hole", Number of Circuits=2, Number of Contacts=2, Number of Levels=1, Number of Pins=2, Number of Poles=2, Number of Positions=2, Number of Positions Per Level=2, Number of Rows=1, Orientation=Straight, Packaging=Bulk, Pitch=2.54mm, Pricing 1="1=1,66, 10=1,14, 50=1,14, 100=1,14, 1000=1,13, 10000=1,13 (USD)", Radiation Hardening=No, Reach SVHC Compliant=No, RoHS=Yes, RoHS Compliant=Yes, Series=MPT, Stock 1=18801, Stripping Length=4.5mm, Supplier 1=Mouser, Termination=Solder, Voltage Rating=125V, Weight=0.022575oz, Width=12mm, Wire Gauge (Max)=26AWG, Wire Gauge (Min)=20AWG, Wire/Cable Gauge=26AWG
H3: "Terminal Block Connector; 6 A; 63 V; 2.54 mm; 26 to 20 AWG; 3; Screw; Soldering; 1.5 kV", Color=Green, Current=6A, Flammability Rating="UL94 V-0", Manufacturer="Phoenix Contact", Max Supply Voltage=63V, Package Quantity=250, Voltage=125V, Approvals=UL,CSA,cULus,EAC, Category="Terminal Blocks", ComponentLink1Description=https://datasheet.ciiva.com/823/1725669-823803.pdf?src-supplier=Digikey, ComponentLink1URL=https://datasheet.ciiva.com/823/1725669-823803.pdf?src-supplier=Digikey, ComponentLink2Description=https://datasheet.ciiva.com/1118/1761576-1118544.pdf?src-supplier=Element14, ComponentLink2URL=https://datasheet.ciiva.com/1118/1761576-1118544.pdf?src-supplier=Element14, ComponentLink3Description=https://datasheet.ciiva.com/7053/312657-7053092.pdf?src-supplier=Newark, ComponentLink3URL=https://datasheet.ciiva.com/7053/312657-7053092.pdf?src-supplier=Newark, ComponentLink4Description=https://datasheet.ciiva.com/3969/1725669-3969975.pdf?src-supplier=Arrow+Electronics, ComponentLink4URL=https://datasheet.ciiva.com/3969/1725669-3969975.pdf?src-supplier=Arrow+Electronics, ComponentLink5Description=https://datasheet.ciiva.com/15169/getdatasheetpartid-178016-15169707.pdf?src-supplier=Verical, ComponentLink5URL=https://datasheet.ciiva.com/15169/getdatasheetpartid-178016-15169707.pdf?src-supplier=Verical, ComponentLink6Description=https://datasheet.ciiva.com/16071/1725669-16071848.pdf?src-supplier=Onlinecomponents.com, ComponentLink6URL=https://datasheet.ciiva.com/16071/1725669-16071848.pdf?src-supplier=Onlinecomponents.com, ComponentLink7Description=https://datasheet.ciiva.com/14607/70054336-14607349.pdf?src-supplier=Allied+Electronics, ComponentLink7URL=https://datasheet.ciiva.com/14607/70054336-14607349.pdf?src-supplier=Allied+Electronics, ComponentLink8Description=https://datasheet.ciiva.com/29223/717267-da-01-en-printklemme-1725669-250-st-29223852.pdf?src-supplier=Conrad, ComponentLink8URL=https://datasheet.ciiva.com/29223/717267-da-01-en-printklemme-1725669-250-st-29223852.pdf?src-supplier=Conrad, Connector Type="Screw,PCB,Terminal Block", Contact Material=Tin, Current Rating=6A, Depth=6.2mm, Height=8.08mm, Housing Color=Green, Housing Material=Polyamide, Insulation Material=Nylon, Lead Free="Lead Free", Length=6.2mm, Manufacturer Part Number=1725669, Max Current Rating=6A, Mount="Through Hole", Number of Circuits=3, Number of Contacts=3, Number of Levels=1, Number of Pins=3, Number of Poles=3, Number of Positions=3, Number of Positions Per Level=3, Number of Rows=1, Orientation=Straight, Packaging=Bulk, Pitch=2.54mm, Pricing 1="10=2,04, 100=1,77, 250=1,72, 500=1,68, 1000=1,64, 2500=1,61, 5000=1,59, 7500=1,57 (USD)", Radiation Hardening=No, Reach SVHC Compliant=No, RoHS=Yes, RoHS Compliant=Yes, Series=MPT, Stock 1=743, Stripping Length=4.5mm, Supplier 1=Onlinecomponents.com, Supplier Part Number 1=1725669, Termination=Solder, Voltage Rating=125V, Weight=0.021658oz, Width=13mm, Wire Gauge (Max)=26AWG, Wire Gauge (Min)=20AWG, Wire/Cable Gauge=26AWG
H4: "Wire-To-Board Terminal Block Rating to EN: 6 A @ 63 VAC/VDC Rating to UL: 6 A @ 125 VAC/VDC Temperature range: -20...", Manufacturer="Phoenix Contact", Max Current Rating=6A, Max Supply Voltage=63V, Category="Terminal Blocks", ComponentLink1Description=https://www.distrelec.biz/Web/Downloads/20/76/uu142076.pdf?mime=application%2Fpdf&src-supplier=Distrelec, ComponentLink1URL=https://www.distrelec.biz/Web/Downloads/20/76/uu142076.pdf?mime=application%2Fpdf&src-supplier=Distrelec, Depth=6.2mm, Housing Material=4261ConductorMaterial, Length=10.62mm, Manufacturer Part Number=MPT0,5/4-2,54, Number of Pins=4, Number of Rows=1NUMBER, Orientation=5491OrientationType, RoHS=Yes, RoHS Compliant=Yes, Stock 1=49, Supplier 1=Sourcengine, Supplier Part Number 1=MPT0,5/4-2,54, Termination=Screw, Wire Gauge (Max)=26AWG, Wire Gauge (Min)=20AWG
Q1: "BC817 Series 45V 500mA SMT NPN General Purpose Transistor - SOT-23", Collector Base Voltage (VCBO)=50V, Collector Emitter Breakdown Voltage=45V, Collector Emitter Saturation Voltage=700mV, Emitter Base Voltage (VEBO)=5V, Manufacturer=Nexperia, Max Collector Current=500mA, Max Operating Temperature=150°C, Power Dissipation=250mW, Supplier Part Number 1=3451903, Category=BJTs, Collector Emitter Voltage (VCEO)=45V, ComponentLink1Description=https://datasheet.octopart.com/BC817-25%2C235-Nexperia-datasheet-108335331.pdf?src-supplier=Farnell, ComponentLink1URL=https://datasheet.octopart.com/BC817-25%2C235-Nexperia-datasheet-108335331.pdf?src-supplier=Farnell, ComponentLink2Description=https://assets.nexperia.com/documents/data-sheet/BC817_SER.pdf?src-supplier=Digikey, ComponentLink2URL=https://assets.nexperia.com/documents/data-sheet/BC817_SER.pdf?src-supplier=Digikey, Height=1.1mm, hFE Min=160, Manufacturer Part Number=BC817-25,235, Number of Elements=1, Number of Pins=3, Packaging="Tape and Reel", Polarity=NPN, Pricing 1="10000=0,0123, 30000=0,0119, 50000=0,0117, 100000=0,0114, 200000=0,011 (USD)", RoHS=Yes, RoHS Compliant=Yes, Stock 1=6440000, Supplier 1="Future Electronics"
Q2 Q3: library part MMBT6427-7-F, "MMBT6427 Series 40 V 500 mA NPN Surface Mount Darlington Transistor - SOT-23-3", Case/Package=SOT-23, Collector Base Voltage (VCBO)=40V, Collector Emitter Saturation Voltage=1.2V, Collector-emitter Voltage-Max=1.5V, Current Rating=500mA, Emitter Base Voltage (VEBO)=12V, Manufacturer=Diodes, Max Operating Temperature=150°C, Max Power Dissipation=300mW, Min Operating Temperature=-55°C, Package Quantity=3000, Supplier Part Number 1=MMBT6427-FDICT-ND, Category=BJTs, Collector Emitter Breakdown Voltage=40V, Collector Emitter Voltage (VCEO)=40V, ComponentLink1Description=https://datasheet.ciiva.com/11211/ds30048-11211443.pdf?src-supplier=Avnet, ComponentLink1URL=https://datasheet.ciiva.com/11211/ds30048-11211443.pdf?src-supplier=Avnet, ComponentLink2Description=https://datasheet.ciiva.com/4459/ds30048-82966-4459317.pdf?src-supplier=Mouser, ComponentLink2URL=https://datasheet.ciiva.com/4459/ds30048-82966-4459317.pdf?src-supplier=Mouser, ComponentLink3Description=https://datasheet.ciiva.com/15139/getdatasheetpartid-67553-15139920.pdf?src-supplier=Verical, ComponentLink3URL=https://datasheet.ciiva.com/15139/getdatasheetpartid-67553-15139920.pdf?src-supplier=Verical, ComponentLink4Description=https://datasheet.ciiva.com/973/ds30048-973062.pdf?src-supplier=Digikey, ComponentLink4URL=https://datasheet.ciiva.com/973/ds30048-973062.pdf?src-supplier=Digikey, ComponentLink5Description=https://datasheet.ciiva.com/973/ds30048-973063.pdf?src-supplier=Digikey, ComponentLink5URL=https://datasheet.ciiva.com/973/ds30048-973063.pdf?src-supplier=Digikey, Height=1mm, hFE Min=10000, Lead Free="Lead Free", Length=3.05mm, Manufacturer Part Number=MMBT6427-7-F, Max Breakdown Voltage=40V, Max Collector Current=500mA, Mount="Surface Mount", Number of Elements=1, Number of Pins=3, Packaging="Tape and Reel", Polarity=NPN, Pricing 1="1=0,21, 10=0,128, 100=0,0796, 500=0,05812, 1000=0,05115 (USD)", Radiation Hardening=No, RoHS=Yes, RoHS Compliant=Yes, Series="Automotive, AEC-Q101", Stock 1=25429, Supplier 1=Digikey, Voltage Rating (DC)=40V, Weight=0.000282oz, Width=1.4mm
R1 R3 R11 R15 R18: library part CRCW04021K00JNED, "Res Thick Film 0402 1K Ohm 5% 1/16W ±200ppm/°C Molded SMD SMD Paper T/R", Case Code (Imperial)=0402, Case Code (Metric)=1005, Manufacturer="Vishay Dale", Max Operating Temperature=155°C, Max Power Dissipation=63mW, Min Operating Temperature=-55°C, Package Quantity=1, Ratings=AEC-Q200, Resistance=1kR, Resistance Tolerance=5%, Resistor Type="Thick Film", Supplier Part Number 1=71-CRCW0402J-1.0K-E3, Temperature Coefficient=200ppm/°C, Voltage Rating=50V, Case/Package=0402, Category="Chip SMD Resistors", ComponentLink1Description=https://datasheet.ciiva.com/2462/dcrcwe3-2462076.pdf?src-supplier=Digikey, ComponentLink1URL=https://datasheet.ciiva.com/2462/dcrcwe3-2462076.pdf?src-supplier=Digikey, ComponentLink2Description=https://datasheet.ciiva.com/2462/dcrcwe3-2462077.pdf?src-supplier=Digikey, ComponentLink2URL=https://datasheet.ciiva.com/2462/dcrcwe3-2462077.pdf?src-supplier=Digikey, ComponentLink3Description=https://datasheet.ciiva.com/2462/dcrcwe3-2462078.pdf?src-supplier=Digikey, ComponentLink3URL=https://datasheet.ciiva.com/2462/dcrcwe3-2462078.pdf?src-supplier=Digikey, ComponentLink4Description=https://datasheet.ciiva.com/7743/dcrcwe3-7743478.pdf?src-supplier=Element14, ComponentLink4URL=https://datasheet.ciiva.com/7743/dcrcwe3-7743478.pdf?src-supplier=Element14, ComponentLink5Description=https://datasheet.ciiva.com/5545/dcrcwe3-109170-5545913.pdf?src-supplier=Mouser, ComponentLink5URL=https://datasheet.ciiva.com/5545/dcrcwe3-109170-5545913.pdf?src-supplier=Mouser, ComponentLink6Description=https://datasheet.ciiva.com/28621/1847332-28621342.pdf?src-supplier=Element14, ComponentLink6URL=https://datasheet.ciiva.com/28621/1847332-28621342.pdf?src-supplier=Element14, ComponentLink7Description=https://datasheet.ciiva.com/16199/dcrcwe3-16199256.pdf?src-supplier=Future+Electronics, ComponentLink7URL=https://datasheet.ciiva.com/16199/dcrcwe3-16199256.pdf?src-supplier=Future+Electronics, ComponentLink8Description=https://datasheet.ciiva.com/16778/70201119-16778053.pdf?src-supplier=Allied+Electronics, ComponentLink8URL=https://datasheet.ciiva.com/16778/70201119-16778053.pdf?src-supplier=Allied+Electronics, Construction=Rectangular, Contact Plating=Tin, Depth=0.5mm, Features="Automotive AEC-Q200", Height=0.016inch, Lead Free="Lead Free", Length=1mm, Manufacturer Part Number=CRCW04021K00JNED, Military Standard=Not, Number of Pins=2, Number of Terminations=2, Packaging="Tape and Reel", Power Rating=63mW, Pricing 1="1=0,1, 10=0,016, 50=0,016, 100=0,009, 1000=0,008, 2500=0,006, 10000=0,004, 20000=0,003 (USD)", Radiation Hardening=No, Reach SVHC Compliant=Unknown, RoHS=Yes, RoHS Compliant=Yes, Series=CRCW, Stock 1=255010, Supplier 1=Mouser, Technology="THICK FILM", Termination=SMD/SMT, Tolerance=5%, Voltage Rating (DC)=50V, Weight=2.3E-05oz, Width=0.02inch, Working Voltage=50V
R2 R4 R17: library part CRCW0402560RJNED, "SMD Chip Resistor, 560 Ohm, ± 5%, 63 mW, 0402 [1005 Metric], Thick Film, General Purpose", Case Code (Imperial)=0402, Case Code (Metric)=1005, Manufacturer="Vishay Dale", Max Operating Temperature=155°C, Max Power Dissipation=63mW, Min Operating Temperature=-55°C, Package Quantity=10000, Ratings=AEC-Q200, Resistance Tolerance=5%, Resistor Type="Thick Film", Supplier Part Number 1=71-CRCW0402J-560-E3, Temperature Coefficient=200ppm/°C, Voltage Rating=50V, Case/Package=0402, Category="Chip SMD Resistors", ComponentLink1Description=https://datasheet.ciiva.com/2524/dcrcwe3-2524414.pdf?src-supplier=Digikey, ComponentLink1URL=https://datasheet.ciiva.com/2524/dcrcwe3-2524414.pdf?src-supplier=Digikey, ComponentLink2Description=https://datasheet.ciiva.com/2524/dcrcwe3-2524415.pdf?src-supplier=Digikey, ComponentLink2URL=https://datasheet.ciiva.com/2524/dcrcwe3-2524415.pdf?src-supplier=Digikey, ComponentLink3Description=https://datasheet.ciiva.com/2524/dcrcwe3-2524416.pdf?src-supplier=Digikey, ComponentLink3URL=https://datasheet.ciiva.com/2524/dcrcwe3-2524416.pdf?src-supplier=Digikey, ComponentLink4Description=https://datasheet.ciiva.com/3256/dcrcwe3-3256649.pdf?src-supplier=Avnet, ComponentLink4URL=https://datasheet.ciiva.com/3256/dcrcwe3-3256649.pdf?src-supplier=Avnet, ComponentLink5Description=https://datasheet.ciiva.com/3256/dcrcwe3-3256650.pdf?src-supplier=Avnet, ComponentLink5URL=https://datasheet.ciiva.com/3256/dcrcwe3-3256650.pdf?src-supplier=Avnet, ComponentLink6Description=https://datasheet.ciiva.com/16436/dcrcwe3-16436119.pdf?src-supplier=Future+Electronics, ComponentLink6URL=https://datasheet.ciiva.com/16436/dcrcwe3-16436119.pdf?src-supplier=Future+Electronics, ComponentLink7Description=https://datasheet.ciiva.com/5548/dcrcwe3-109170-5548972.pdf?src-supplier=Mouser, ComponentLink7URL=https://datasheet.ciiva.com/5548/dcrcwe3-109170-5548972.pdf?src-supplier=Mouser, Contact Plating=Tin, Features="Automotive AEC-Q200", Height=0.35mm, Lead Free="Lead Free", Length=1mm, Manufacturer Part Number=CRCW0402560RJNED, Number of Pins=2, Number of Terminations=2, Packaging="Cut Tape", Power Rating=63mW, Pricing 1="1=0,1, 10=0,015, 50=0,015, 100=0,009, 1000=0,007, 2500=0,006, 10000=0,004 (USD)", Radiation Hardening=No, Reach SVHC Compliant=Unknown, Resistance=560R, RoHS=Yes, RoHS Compliant=Yes, Series=CRCW, Size Code=0402, Stock 1=36463, Supplier 1=Mouser, Tolerance=5%, Voltage Rating (DC)=50V, Weight=2.3E-05oz, Width=0.5mm
R5 R6 R8 R9 R12 R13 R14 R16 R20 R21: library part ERJ-PA3F1003V, "SMD Chip Resistor, 100 kOhm, ± 1%, 250 mW, 0603 [1608 Metric], Thick Film, Anti-Surge", Case Code (Imperial)=0603, Case Code (Metric)=1608, Manufacturer=Panasonic, Max Operating Temperature=155°C, Max Power Dissipation=250mW, Min Operating Temperature=-55°C, Ratings=AEC-Q200, Resistance=100kR, Resistance Tolerance=1%, Resistor Type="Thick Film", Supplier Part Number 1=P100KBYCT-ND, Temperature Coefficient=100ppm/°C, Voltage Rating=150V, Case/Package=0603, Category="Chip SMD Resistors", ComponentLink1Description=https://datasheet.ciiva.com/22781/1801181-22781557.pdf?src-supplier=Farnell, ComponentLink1URL=https://datasheet.ciiva.com/22781/1801181-22781557.pdf?src-supplier=Farnell, ComponentLink2Description=https://datasheet.ciiva.com/49048/1801181-49048299.pdf?src-supplier=Element14, ComponentLink2URL=https://datasheet.ciiva.com/49048/1801181-49048299.pdf?src-supplier=Element14, Depth=0.8mm, Features="Automotive AEC-Q200", Height=0.018inch, Length=0.063inch, Manufacturer Part Number=ERJ-PA3F1003V, Mount="Surface Mount", Number of Terminations=2, Packaging="Cut Tape", Power Rating=250mW, Pricing 1="1=0,14, 10=0,071, 50=0,0468, 100=0,0397, 500=0,0282, 1000=0,02477 (USD)", Reach SVHC Compliant=No, RoHS=Yes, Series=ERJ, Stock 1=59135, Supplier 1=Digikey, Technology="THICK FILM", Termination=Solder, Tolerance=1%, Voltage Rating (DC)=150V, Width=0.031inch
R7 R19: library part RCA0402100KFKED, "RCA FIXED RESISTOR 0402 (1005Metric) Chip Resistor ±1% ±100ppm/C 100kOhm 0.063W 1/16W", Case Code (Imperial)=0402, Case Code (Metric)=1005, Manufacturer="Vishay Dale", Max Operating Temperature=155°C, Max Power Dissipation=63mW, Min Operating Temperature=-55°C, Resistance=100kR, Resistance Tolerance=1%, Resistor Type="Thick Film", Supplier Part Number 1=71-RCA0402100KFKED, Temperature Coefficient=100ppm/°C, Voltage Rating=50V, Case/Package=0402, Category="Chip SMD Resistors", ComponentLink1Description=https://datasheet.ciiva.com/8980/rcae3-8980646.pdf?src-supplier=Avnet, ComponentLink1URL=https://datasheet.ciiva.com/8980/rcae3-8980646.pdf?src-supplier=Avnet, Contact Plating=Tin, Features="Automotive AEC-Q200,Anti-Sulfur", Height=0.016inch, Lead Free="Lead Free", Length=0.039inch, Manufacturer Part Number=RCA0402100KFKED, Number of Terminations=2, Packaging="Tape and Reel", Power Rating=63mW, Pricing 1="1=0,1, 10=0,027, 50=0,027, 100=0,016, 1000=0,013, 2500=0,011, 10000=0,01 (USD)", Radiation Hardening=No, Reach SVHC Compliant=No, RoHS=Yes, RoHS Compliant=Yes, Series=RCA, Stock 1=20781, Supplier 1=Mouser, Tolerance=1%, Voltage Rating (DC)=50V, Width=0.02inch
R10: library part CRCW04021M00FKEDC, "Res Thick Film 0402 1M Ohm 1% 0.063W(1/16W) ±100ppm/C Pad SMD T/R", Case/Package=0402, Manufacturer="Vishay Semiconductors", Max Operating Temperature=155°C, Max Power Dissipation=63mW, Min Operating Temperature=-55°C, Resistance=1MR, Supplier Part Number 1=71-CRCW04021M00FKEDC, Temperature Coefficient=100ppm/°C, Tolerance=1%, Voltage Rating=50V, Category="Chip SMD Resistors", ComponentLink1Description=http://www.vishay.com/docs/28773/crcwce3.pdf?src-supplier=Digikey, ComponentLink1URL=http://www.vishay.com/docs/28773/crcwce3.pdf?src-supplier=Digikey, ComponentLink2Description=https://datasheet.octopart.com/CRCW04021M00FKEDC-Vishay-datasheet-100063072.pdf?src-supplier=Future+Electronics, ComponentLink2URL=https://datasheet.octopart.com/CRCW04021M00FKEDC-Vishay-datasheet-100063072.pdf?src-supplier=Future+Electronics, Height=350um, Lead Free=5697LeadFree, Manufacturer Part Number=CRCW04021M00FKEDC, Number of Terminations=2, Packaging="Tape and Reel", Pricing 1="1=0,1, 10=0,016, 50=0,016, 100=0,009, 1000=0,007, 2500=0,005, 10000=0,003 (USD)", RoHS=Yes, RoHS Compliant=Yes, Series=CRCW-C, Stock 1=316158, Supplier 1=Mouser
U1: "Accelerometer Dual ±40g 4.75V to 5.25V 47.5mV/g to 52.5mV/g 20-Pin SOIC T/R", Case/Package=SOIC, Manufacturer="NXP Freescale", Max Operating Temperature=125°C, Min Operating Temperature=-40°C, Operating Supply Voltage=5.25V, Package Quantity=1000, Supplier Part Number 1=85AK8921, Category=Accelerometers, ComponentLink1Description=https://datasheet.ciiva.com/3271/mma3201keg-3271720.pdf?src-supplier=Avnet, ComponentLink1URL=https://datasheet.ciiva.com/3271/mma3201keg-3271720.pdf?src-supplier=Avnet, Manufacturer Part Number=MMA3201KEGR2, Mount="Surface Mount", Number of Pins=20, Packaging="Tape and Reel", Pricing 1="1000=10,72 (USD)", RoHS=Yes, RoHS Compliant=Yes, Series=MMA3201, Supplier 1=Newark, Weight=0.008826oz
U2: "IC DRVR/RCVR MLTCH RS232 16TSSOP", Case/Package=TSSOP, Manufacturer="Texas Instruments", Max Operating Temperature=85°C, Max Supply Voltage=5.5V, Min Operating Temperature=-40°C, Min Supply Voltage=3V, Operating Supply Current=1mA, Operating Supply Voltage=5V, Package Quantity=1, Supplier Part Number 1=595-MAX3232IPWR, Category="Interface ICs", ComponentLink1Description=https://datasheet.ciiva.com/1702/max3232-1702050.pdf?src-supplier=Digikey, ComponentLink1URL=https://datasheet.ciiva.com/1702/max3232-1702050.pdf?src-supplier=Digikey, ComponentLink2Description=https://datasheet.ciiva.com/1702/max3232-1702051.pdf?src-supplier=Digikey, ComponentLink2URL=https://datasheet.ciiva.com/1702/max3232-1702051.pdf?src-supplier=Digikey, ComponentLink3Description=https://datasheet.ciiva.com/1702/max3232-1702052.pdf?src-supplier=Digikey, ComponentLink3URL=https://datasheet.ciiva.com/1702/max3232-1702052.pdf?src-supplier=Digikey, ComponentLink4Description=https://datasheet.ciiva.com/8064/1882754-8064747.pdf?src-supplier=Element14, ComponentLink4URL=https://datasheet.ciiva.com/8064/1882754-8064747.pdf?src-supplier=Element14, ComponentLink5Description=https://datasheet.ciiva.com/46384/1882754-46384398.pdf?src-supplier=Element14, ComponentLink5URL=https://datasheet.ciiva.com/46384/1882754-46384398.pdf?src-supplier=Element14, ComponentLink6Description=https://datasheet.ciiva.com/48709/001047902-da-01-en-ic-drv-rx-mulch-max3232ipwr-tssop-16-tid-48709190.pdf?src-supplier=Conrad, ComponentLink6URL=https://datasheet.ciiva.com/48709/001047902-da-01-en-ic-drv-rx-mulch-max3232ipwr-tssop-16-tid-48709190.pdf?src-supplier=Conrad, Data Rate=250Kbps, Lead Free="Lead Free", Logic Function=Transceiver,Receiver, Manufacturer Part Number=MAX3232IPWR, Mount="Surface Mount", Number of Drivers=2, Number of Pins=16, Number of Receivers=2, Number of Transceivers=1, Number of Transmitters=2, Packaging="Tape and Reel", Pricing 1="1=0,85, 10=0,546, 50=0,546, 100=0,447, 1000=0,413, 10000=0,37 (USD)", Reach SVHC Compliant=No, RoHS=Yes, RoHS Compliant=Yes, Series=-, Simplex/Duplex="Full Duplex", Stock 1=72064, Supplier 1=Mouser, Supply Current=1mA, Weight=0.002183oz